# Altium PCB quark_dog_driver.PcbDoc (part 3 of 3)
Units mil, origin at the board's own origin, x right, y up, seen from the top; angles counter-clockwise.
Board outline 3937.01 x 2362.2 mil, 4 copper layers (Top Layer 1, signal1, signal2, Bottom Layer 1), stack 23.756 mil thick; 353 components, 275 nets, 1099 pads, 468 vias.
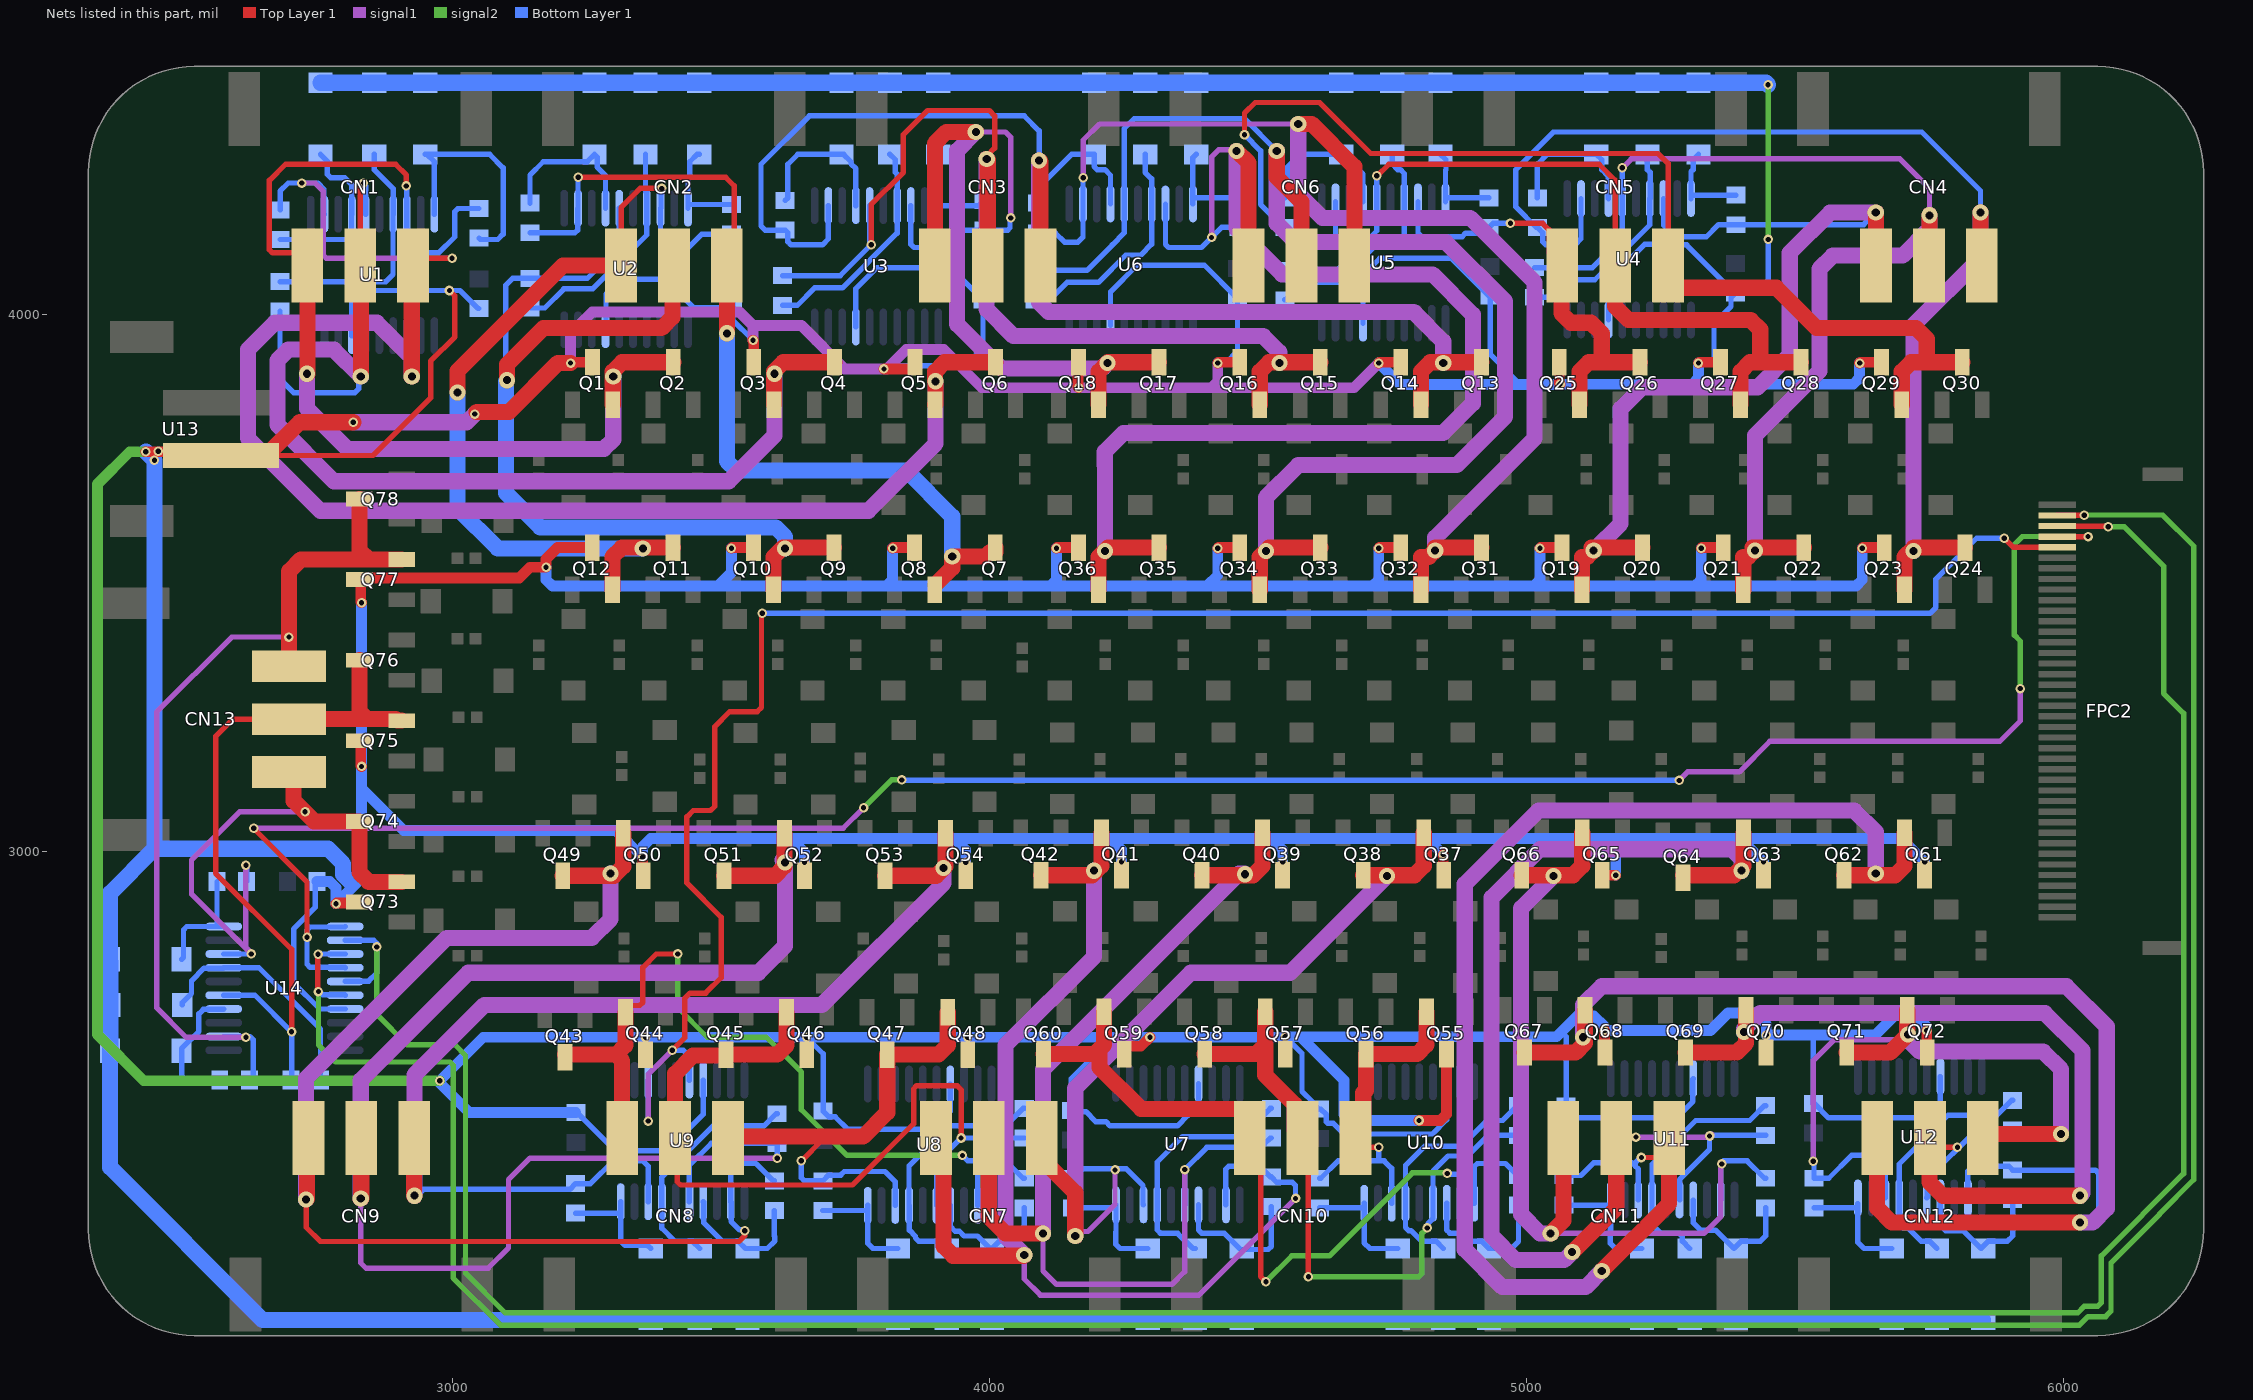
[diagram p5: the nets of this part, all layers, seen from the top]

## Via types
v1: diameter 17.72, hole 9.84, Top Layer 1 to Bottom Layer 1, tented both sides, 410 vias
v2: diameter 30, hole 15, Top Layer 1 to Bottom Layer 1, tented both sides, 54 vias
v3: diameter 78.74, hole 78.74, Top Layer 1 to Bottom Layer 1, 4 vias

## Nets (pads, with @x,y where several pads share a name; then routed paths per layer and width w, separated by ;. In a path a pad name is that pad's centre, name@x,y a point inside that pad or via, vN(x,y) a via of type N, cw(c..) or ccw(c..) an arc to the next point about the centre after c; other vN are vias at no path point) (continued)
PWM12_3: FPC2.36 U9.3 U9.6 | length 3815
  Top Layer 1 w10: v1(3410,2631) 3432.76,2653.76 3432.76,2726.76 3443,2737 3472,2737 3501,2766 3501,2878 3437,2942 3437,3065.12 3448.88,3077 3481,3077 3489,3085 3489,3233.14 3516.86,3261 3568,3261 3576,3269 3576,3442.58 v1(3577.52,3444.09) ; v1(5889,3584) 5905.89,3567.15 FPC2.36@5987.77,3567.15
  signal1 w10: v1(3365.02,2499.02) 3365.02,2586.02 v1(3410,2631)
  Bottom Layer 1 w10: v1(3365.02,2499.02) U9.3@3365.02,2575.03 ; v1(3410,2631) 3430.03,2631 3441.79,2619.24 U9.6@3441.79,2575.03 ; v1(3577.52,3444.09) 5751.09,3444.09 5762,3455 5762,3508 5838,3584 v1(5889,3584)
PWM13_1: FPC2.37 U14.1 U14.4 | length 4360.7
  Top Layer 1 w10: v1@2630,3044 2730,2944 v1(2730,2841) ; FPC2.37@5987.77,3586.83 5987.86,3586.92 6045.2,3586.92 v1(6045.28,3587)
  signal1 w10: v1(2631,3044) 3728,3044 v1(3766,3082) ; v1(5284,3133) 5300,3149 5396,3149 5453,3206 5881,3206 5919,3244 v1(5919,3304)
  signal2 w10: v1(3766,3082) 3818,3134 v1(3837,3134) ; v1(5919,3304) 5919,3392.33 5908,3403.33 5908,3572 5923,3587 v1(6045.28,3587)
  Bottom Layer 1 w10: U14.4@2801,2784.32 2800.17,2785.15 2735.86,2785.15 2730,2791.01 v1(2730,2841) 2730,2854.4 2735.86,2860.26 2800.17,2860.26 U14.1@2801,2861.09 ; v1(3837,3134) 3837.5,3133.5 5283.5,3133.5 v1(5284,3133)
PWM13_2: FPC2.38 U14.2 U14.5 | length 5671.6
  Top Layer 1 w10: FPC2.38@5987.77,3606.52 5988.43,3605.86 6082.14,3605.86 v1(6083,3605)
  signal2 w10: v1(2860,2823) 2860,2697 2916,2641 3005,2641 3025,2621 3025,2216 3099,2142 6026,2142 6038,2154 6063,2154 6070,2161 6070,2248 6223,2401 6223,3257.84 6186,3294.84 6186,3532 6113,3605 v1(6083,3605)
  Bottom Layer 1 w10: U14.5@2801,2758.73 2801.83,2759.56 2844.56,2759.56 2860,2775 v1(2860,2823) 2860,2829.64 2854.14,2835.5 U14.2@2801,2835.5
PWM13_3: FPC2.39 U14.3 U14.6 | length 5834.5
  Top Layer 1 w10: v1@2750,2740 2750,2808.88 v1(2750.56,2809.45) ; FPC2.39@5987.77,3626.2 5988.1,3626.53 6037.67,3626.53 v1(6038,3626.86)
  signal2 w10: v1(2751.26,2739.98) 2751.26,2640.74 2783,2609 2996.14,2609 3002,2603.14 3002,2207 3090,2119 6029,2119 6045,2135 6078,2135 6088,2145 6088,2235 6179,2326 6179,2327 6242,2390 6242,3569 6184,3627 6038.14,3627 v1(6038,3626.86)
  Bottom Layer 1 w10: v1@2750.09,2809.91 U14.3@2801,2809.91 ; v1(2751.26,2739.98) 2753.35,2739.98 2759.36,2733.97 2800.17,2733.97 U14.6@2801,2733.14
VB1_1: C2.1 D108.1 U1.20 | length 445.9
  Bottom Layer 1 w10: D108.1@2950,4298.37 D108.1@2953.36,4298.37 ; U1.20@2967.06,4187.06 2967.06,4284.66 D108.1@2953.36,4298.37 ; C2.1@3050,4142.44 3052.45,4140 3085,4140 3095,4150 3095,4273.42 3070.06,4298.37 D108.1@2953.36,4298.37
VB1_2: C4.2 D109.1 U1.17 | length 454
  Bottom Layer 1 w10: C4.2@2679.68,4061.59 2876.59,4061.59 2890,4075 2890,4186.77 U1.17@2890.29,4187.06 2890.29,4234.71 2855,4270 D109.1@2855,4298.37
VB1_3: C3.1 D110.1 U1.14 | length 328.2
  Bottom Layer 1 w10: C3.1@2680,4139.89 2807.66,4139.89 2812.69,4144.92 2812.69,4186.23 U1.14@2813.52,4187.06 2813.52,4241.48 2800,4255 2773.79,4255 2767.93,4260.86 2767.93,4285.44 D110.1@2755,4298.37
VB2_1: C7.1 D93.1 U2.20 | length 192.9
  Bottom Layer 1 w10: U2.20@3439.17,4198.06 U2.20@3439.17,4203 ; D93.1@3460,4298.37 3456.06,4298.37 3442.36,4284.66 3442.36,4257.36 3439.17,4254.17 U2.20@3439.17,4203 ; C7.1@3520,4205 3441.17,4205 U2.20@3439.17,4203
VB2_2: C5.2 D106.1 U2.17 | length 424.5
  Bottom Layer 1 w10: C5.2@3145,4012.45 3172.45,4012.45 3208,4048 3261.63,4048 3308.01,4094.38 3362.4,4148.77 3362.4,4226.36 3360,4228.76 D106.1@3360,4298.37
VB2_3: C6.1 D107.1 U2.14 | length 297.2
  Bottom Layer 1 w10: C6.1@3145,4207.56 3145,4260 3169.66,4284.66 3251.3,4284.66 D107.1@3265,4298.37 3270,4293.37 3270,4275 3285.62,4259.38 U2.14@3285.62,4198.06
VB3_1: C11.1 D84.1 U3.20 | length 183
  Bottom Layer 1 w10: D84.1@3905,4298.37 3905.17,4298.2 3905.17,4205.06 3907.17,4203.06 3980.51,4203.06 C11.1@3990,4212.56
VB3_2: C9.2 D91.1 U3.17 | length 421.2
  Bottom Layer 1 w10: C9.2@3615,4017.45 3642.45,4017.45 3675,4050 3726.67,4050 3828.4,4151.73 3828.4,4261.6 3825,4265 3825,4288.37 D91.1@3815,4298.37
VB3_3: C10.1 D92.1 U3.14 | length 285.8
  Bottom Layer 1 w10: C10.1@3620,4212.56 3625,4217.56 3625,4280 3643.37,4298.37 D92.1@3725,4298.37 3728.94,4298.37 3742.64,4284.66 3742.64,4280.73 3751.62,4271.74 U3.14@3751.62,4203.06
VB4_1: C23.1 D118.1 U6.20 | length 181.6
  Bottom Layer 1 w10: U6.20@4379.02,4206.06 U6.20@4379.02,4215.55 ; D118.1@4385,4298.37 4379.02,4292.39 U6.20@4379.02,4215.55 ; C23.1@4465,4217.56 4381.02,4217.56 U6.20@4379.02,4215.55
VB4_2: C21.2 D52.1 U6.17 | length 432.4
  Bottom Layer 1 w10: C21.2@4085,4027.45 4112.44,4027.45 4145,4060 4203,4060 4254,4111 4282,4111 4302.25,4131.25 U6.17@4302.25,4206.06 4302.25,4252.75 4290,4265 D52.1@4290,4298.37
VB4_3: C22.1 D53.1 U6.14 | length 271.9
  Bottom Layer 1 w10: C22.1@4090,4207.56 4090,4235 4153.37,4298.37 D53.1@4195,4298.37 4195,4275.86 4200.86,4270 4215,4270 4225.48,4259.52 U6.14@4225.48,4206.06
VB5_1: C18.1 D81.1 U5.20 | length 174.5
  Bottom Layer 1 w10: D81.1@4840,4298.37 4850,4288.37 4850,4270 4849.17,4269.17 U5.20@4849.17,4215.55 ; U5.20@4849.17,4210.06 U5.20@4849.17,4215.55 ; C18.1@4930,4217.56 4851.17,4217.56 U5.20@4849.17,4215.55
VB5_2: C20.2 D82.1 U5.17 | length 434.8
  Bottom Layer 1 w10: C20.2@4550,4027.45 4551.97,4027.45 4574.52,4050 4585,4050 4595,4060 4650,4060 4725,4135 4759.14,4135 4772.4,4148.25 U5.17@4772.4,4210.06 4772.4,4262.6 4765,4270 4760,4270 4750,4280 D82.1@4750,4298.37
VB5_3: C19.1 D83.1 U5.14 | length 276.6
  Bottom Layer 1 w10: C19.1@4550,4217.56 4555,4222.56 4555,4275 4578.37,4298.37 4658.94,4298.37 4695.62,4261.68 U5.14@4695.62,4210.06
VB6_1: C14.1 D72.1 U4.20 | length 172.7
  Bottom Layer 1 w10: U4.20@5306.17,4216.06 U4.20@5306.17,4220.55 ; D72.1@5320,4298.37 5310,4288.37 5310,4270 5306.17,4266.17 U4.20@5306.17,4220.55 ; C14.1@5390,4222.56 5308.17,4222.56 U4.20@5306.17,4220.55
VB6_2: C16.2 D79.1 U4.17 | length 403.6
  Bottom Layer 1 w10: C16.2@5015,4032.45 5042.44,4032.45 5075,4065 5127,4065 5229.4,4167.4 U4.17@5229.4,4216.06 5230,4216.66 5230,4265 5225,4270 D79.1@5225,4298.37
VB6_3: C15.1 D80.1 U4.14 | length 271.7
  Bottom Layer 1 w10: C15.1@5020,4217.56 5020,4280 5038.37,4298.37 D80.1@5130,4298.37 5140,4288.37 5140,4270 5151.8,4258.2 5151.8,4216.89 U4.14@5152.62,4216.06
VB7_1: C47.1 D54.1 U12.20 | length 222.4
  Bottom Layer 1 w10: C47.1@5535,2337.45 5614.83,2337.45 U12.20@5616.83,2339.45 ; U12.20@5616.83,2345 U12.20@5616.83,2339.45 ; D54.1@5680,2261.63 5628.37,2261.63 5616.83,2273.17 U12.20@5616.83,2339.45
VB7_2: C45.2 D55.1 U12.17 | length 461.8
  Bottom Layer 1 w10: D55.1@5764,2261.63 5750.3,2275.34 5734.66,2275.34 5710,2300 5700,2300 5693.6,2306.4 U12.17@5693.6,2355.94 5693.6,2418.6 5785,2510 5875.48,2510 5903.03,2537.55 C45.2@5905,2537.55
VB7_3: C46.1 D56.1 U12.14 | length 280.9
  Bottom Layer 1 w10: U12.14@5770.38,2355.94 5770.38,2304.62 5780,2295 5812.7,2295 5846.06,2261.63 5859.76,2275.34 5895.34,2275.34 5905,2285 C46.1@5905,2352.45
VB8_1: C42.1 D37.1 U11.20 | length 220.3
  Bottom Layer 1 w10: C42.1@5070,2342.45 5154.83,2342.45 5156.83,2340.44 5156.83,2297.84 5155.93,2296.94 5155.93,2271.14 5165.43,2261.63 D37.1@5215,2261.63
VB8_2: C44.2 D38.1 U11.17 | length 462.8
  Bottom Layer 1 w10: D38.1@5304,2261.63 5303.7,2261.63 5290,2275.34 5290,2284.14 5284.14,2290 5250,2290 5233.6,2306.4 U11.17@5233.6,2351.94 5233.6,2418.6 5315,2500 5415.48,2500 5443.03,2527.55 C44.2@5445,2527.55
VB8_3: C43.1 D39.1 U11.14 | length 258.9
  Bottom Layer 1 w10: U11.14@5310.38,2351.94 5310.38,2309.62 5324.04,2295.96 5351.73,2295.96 5386.06,2261.63 5399.76,2275.34 5435.34,2275.34 5445,2285 C43.1@5445,2337.45
VB9_1: C38.1 D25.1 U10.20 | length 224
  Bottom Layer 1 w10: C38.1@4615,2337.45 4695.83,2337.45 U10.20@4697.83,2339.45 ; U10.20@4697.83,2345.94 U10.20@4697.83,2339.45 ; D25.1@4760,2261.63 4708.37,2261.63 4697.83,2272.17 U10.20@4697.83,2339.45
VB9_2: C40.2 D26.1 U10.17 | length 458.6
  Bottom Layer 1 w10: D26.1@4845,2261.63 4831.3,2275.34 4804.66,2275.34 4785,2295 4780.46,2295 4774.6,2300.86 U10.17@4774.6,2345.94 4774.6,2416.43 4810.18,2452 4878,2452 4926,2500 4955.48,2500 4983.03,2527.55 C40.2@4985,2527.55
VB9_3: C39.1 D27.1 U10.14 | length 270.7
  Bottom Layer 1 w10: U10.14@4851.38,2345.94 4851.38,2296.19 4857.23,2290.34 4871.78,2290.34 4872.11,2290 4875,2290 4889.66,2275.34 4916.3,2275.34 D27.1@4930,2261.63 4971.63,2261.63 4985,2275 C39.1@4985,2342.45
VB10_1: C26.1 D57.1 U7.20 | length 218.4
  Bottom Layer 1 w10: C26.1@4155,2337.45 4233.83,2337.45 U7.20@4235.83,2339.45 ; U7.20@4235.83,2342.94 U7.20@4235.83,2339.45 ; D57.1@4295,2261.63 4243.37,2261.63 4235,2270 4235,2291.9 4235.83,2292.74 U7.20@4235.83,2339.45
VB10_2: C28.2 D70.1 U7.17 | length 464.9
  Bottom Layer 1 w10: D70.1@4383,2261.63 4379.06,2261.63 4350.69,2290 4325.17,2290 4324.83,2290.34 4318.46,2290.34 4312.6,2296.19 U7.17@4312.6,2342.94 4312.6,2422.6 4360,2470 4470.48,2470 4523.03,2522.55 C28.2@4525,2522.55
VB10_3: C27.1 D71.1 U7.14 | length 273.8
  Bottom Layer 1 w10: U7.14@4389.38,2342.94 4389.38,2296.19 4395.23,2290.34 4409.78,2290.34 4410.11,2290 4437.7,2290 4467.7,2260 4519.14,2260 4525,2265.86 C27.1@4525,2339.89
VB11_1: C31.1 D28.1 U8.20 | length 215.5
  Bottom Layer 1 w10: C31.1@3690,2332.45 3771.83,2332.45 U8.20@3773.83,2334.45 ; U8.20@3773.83,2341.94 U8.20@3773.83,2334.45 ; D28.1@3830,2261.63 3783.37,2261.63 3773.83,2271.17 U8.20@3773.83,2334.45
VB11_2: C29.2 D29.1 U8.17 | length 464.6
  Bottom Layer 1 w10: D29.1@3921,2261.63 3907.3,2275.34 3868.5,2275.34 3862.64,2281.19 3862.64,2284.48 3851.07,2296.05 3851.07,2341.47 U8.17@3850.6,2341.94 3850.6,2415.6 3925,2490 4030,2490 4035,2495 4035.48,2495 4063.03,2522.55 C29.2@4065,2522.55
VB11_3: C30.1 D30.1 U8.14 | length 253.1
  Bottom Layer 1 w10: U8.14@3927.38,2341.94 3927.38,2302.62 3936.19,2293.81 3944.3,2293.81 3953.11,2285 3977.7,2285 4001.06,2261.63 D30.1@4005,2261.63 4018.37,2275 4050,2275 4065,2290 C30.1@4065,2337.45
VB12_1: C35.1 D16.1 U9.20 | length 220.1
  Bottom Layer 1 w10: C35.1@3230,2327.45 3311.84,2327.45 U9.20@3313.84,2329.45 ; U9.20@3313.84,2348.97 U9.20@3313.84,2329.45 ; D16.1@3370,2261.63 3364.15,2267.49 3321.81,2267.49 3313.84,2275.46 U9.20@3313.84,2329.45
VB12_2: C33.2 D17.1 U9.17 | length 444.5
  Bottom Layer 1 w10: D17.1@3461,2261.63 3447.63,2275 3415,2275 3390.61,2299.39 3390.61,2394.61 3486,2490 3580.48,2490 3603.03,2512.55 C33.2@3605,2512.55
VB12_3: C34.1 D18.1 U9.14 | length 254.9
  Bottom Layer 1 w10: U9.14@3467.38,2348.97 3468.21,2348.14 3468.21,2309.91 3503.12,2275 3532.7,2275 3546.06,2261.63 3586.63,2261.63 3600.86,2275.86 3600.86,2284.14 3600,2285 C34.1@3600,2332.45
VB13_1: C50.1 D1.1 U14.20 | length 218.6
  Bottom Layer 1 w10: D1.1@2496.63,2800 2500,2803.37 2500,2855 2506.09,2861.09 U14.20@2564.45,2861.09 ; C50.1@2562.45,2945 2562.45,2863.09 U14.20@2564.45,2861.09 ; U14.20@2574.94,2861.09 U14.20@2564.45,2861.09
VB13_2: C52.2 D2.1 U14.17 | length 444.6
  Bottom Layer 1 w10: D2.1@2497.63,2715.03 2497.63,2718.97 2515,2736.33 2515,2760 2538.49,2783.49 2574.11,2783.49 U14.17@2574.94,2784.32 2640.68,2784.32 2755,2670 C52.2@2755,2575
VB13_3: C51.1 D3.1 U14.14 | length 252.8
  Bottom Layer 1 w10: C51.1@2567.45,2575 2505,2575 2496.63,2583.37 D3.1@2496.63,2630 2496.63,2633.94 2528.66,2665.96 2528.66,2698.66 2537.01,2707.01 2574.4,2707.01 U14.14@2574.94,2707.55
VIN: C1.2 C8.2 C12.2 C13.2 C17.2 C24.2 C25.2 C32.2 C36.2 C37.2 C41.2 C48.2 C49.2 D1.2 D2.2 D3.2 D16.2 D17.2 D18.2 D25.2 D26.2 D27.2 D28.2 D29.2 D30.2 D37.2 D38.2 D39.2 D52.2 D53.2 D54.2 D55.2 D56.2 D57.2 D70.2 D71.2 D72.2 D79.2 D80.2 D81.2 D82.2 D83.2 D84.2 D91.2 D92.2 D93.2 D106.2 D107.2 D108.2 D109.2 D110.2 D118.2 Q1.3 Q3.3 Q5.3 Q8.3 Q10.3 Q12.3 Q14.3 Q16.3 Q18.3 Q19.3 Q21.3 Q23.3 Q25.3 Q27.3 Q29.3 Q32.3 Q34.3 Q36.3 Q37.3 Q39.3 Q41.3 Q44.3 Q46.3 Q48.3 Q50.3 Q52.3 Q54.3 Q55.3 Q57.3 Q59.3 Q61.3 Q63.3 Q65.3 Q68.3 Q70.3 Q72.3 Q73.3 Q75.3 Q77.3 U1.7 U2.7 U3.7 U4.7 U5.7 U6.7 U7.7 U8.7 U9.7 U10.7 U11.7 U12.7 U13.2 U14.7 | length 32914.6
  Top Layer 1 w10: U13.2@2654.47,3737.82 2852.82,3737.82 2960,3845 2960,3913.41 3005,3958.41 3005,4035 v1(2995,4045)
  Top Layer 1 w20: v1(2430,3745) 2562.64,3745 U13.2@2569.82,3737.82 U13.2@2654.47,3737.82 ; v1(2784,2903.6) 2785.39,2905 Q73.3@2825,2905 ; Q75.3@2830,3200 2830,3160.39 v1(2831.4,3159) ; Q77.3@2830,3505 2830,3465.39 v1(2831.4,3464) ; Q77.3@2835,3510 3125,3510 3145,3530 v1(3175,3530) 3175,3545 3196.4,3566.4 Q12.3@3261,3566.4 ; v1(3042,3815) v1@3046,3819 ; v1(3220.58,3910) 3221.97,3911.4 Q1.3@3261.58,3911.4 ; v1(3355,2990) 3355,2965 3356,2964 Q50.3@3356,2955.63 ; v1(3520,3565) 3521.4,3566.4 Q10.3@3561,3566.4 ; v1(3560.18,3952.4) 3561.58,3951 Q3.3@3561.58,3911.4 ; v1(3803.86,3899) 3857.8,3899 3861.58,3902.78 Q5.3@3861.58,3911.4 ; v1(3820,3565) 3821.4,3566.4 Q8.3@3861,3566.4 ; v1(4125,3565) 4126.4,3566.4 Q36.3@4166,3566.4 ; Q18.3@4165,3905 4165,3865.39 v1(4166.4,3864) ; Q59.3@4251,2623.5 4251,2634.33 4254.78,2638.11 4282.11,2638.11 v1(4299,2655) ; v1(4425,3565) 4426.4,3566.4 Q34.3@4466,3566.4 ; v1(4425,3910) 4426.4,3911.4 Q16.3@4466,3911.4 ; v1(4725,3565) 4726.4,3566.4 Q32.3@4766,3566.4 ; v1(4725,3910) 4726.4,3911.4 Q14.3@4766,3911.4 ; v1(4800,2500) 4839.28,2500 4851,2511.72 Q55.3@4851,2623.5 ; Q37.3@4845,2970 v1(4845,2995) ; v1(5025,3565) 5026.4,3566.4 Q19.3@5066,3566.4 ; Q25.3@5061,3911.4 5061,3871.79 v1(5062.4,3870.39) ; Q65.3@5141,2956.6 v1(5166,2956.6) ; Q68.3@5145,2635 v1(5145,2667.39) ; v1(5320,3910) 5321.4,3911.4 Q27.3@5361,3911.4 ; v1(5325,3565) 5326.4,3566.4 Q21.3@5366,3566.4 ; v1(5620,3910) 5621.4,3911.4 Q29.3@5661,3911.4 ; v1(5625,3565) 5626.4,3566.4 Q23.3@5666,3566.4 ; Q72.3@5745,2635 v1(5745,2667.39)
  Top Layer 1 w30: U13.2@2654.47,3737.82 2716.48,3799.82 v1(2816,3799.82) ; v1@3046,3819 3106,3819 3197,3910 v1(3220.58,3910)
  signal1 w20: v1(3220.58,3910) 3220.58,3964.59 3260.98,4005 3535,4005 3560.18,3979.82 ; v1(3560.18,3952.4) 3560.18,3979.82 ; v1(4425,3910) 4425,3875.71 4413.28,3864 ; v1(4725,3910) 4679,3864 4413.28,3864 ; 3560.18,3979.82 3650.18,3979.82 3731,3899 v1(3803.86,3899) 3809.58,3899 3845.58,3935 3915,3935 3986,3864 v1(4166.4,3864) 4413.28,3864
  signal1 w30: v1(2816,3799.82) 3026.82,3799.82 v1(3042,3815)
  signal2 w10: v1(5450,4140) v1@5450,4430
  signal2 w20: v1(2430,3745) 2400,3745 2340,3685 2340,2660 2426,2574 v1(2977,2574)
  Bottom Layer 1 w10: C49.2@2748.55,2945.24 2745,2941.69 2745,2896.48 2705,2856.48 2705,2756.21 2753.66,2707.55 U14.7@2801,2707.55 ; U1.7@2813.52,3961 2813.52,4039.14 2819.38,4045 v1(2995,4045) 3014.62,4045 3048.14,4011.47 C1.2@3050.11,4011.47 ; C36.2@3230.79,2514.55 3232.76,2514.55 3303.31,2444 3400,2444 3467.38,2511.38 U9.7@3467.38,2575.03 ; U2.7@3285.62,3972 3286.45,3972.83 3286.45,4038.45 3314,4066 3396.57,4066 3449.57,4013 3512.74,4013 C8.2@3522.22,4022.47 3522.22,3990.37 v1(3560.18,3952.4) ; v1(3660,2655) 3690.78,2624.21 C32.2@3690.78,2517.53 3701.53,2506.78 3713.22,2506.78 3736,2484 3894,2484 3927.38,2517.38 U8.7@3927.38,2568 ; U3.7@3751.62,3977 3751.62,4048.62 3790,4087 3928.69,4087 C12.2@3988.22,4027.47 3988.22,3938.22 3955,3905 3811.95,3905 ; U6.7@4225.48,3980 4225.48,4042.48 4275,4092 4400.54,4092 C24.2@4462.07,4030.47 4462.07,3932.07 4441.48,3911.48 4426.48,3911.48 v1(4425,3910) ; 4270,2655 4230,2655 4152.78,2577.78 C25.2@4152.78,2518.53 4154.95,2516.36 4179.64,2516.36 4198,2498 4217,2498 4225,2490 4350,2490 4370,2510 4370.88,2510 4389.38,2528.5 U7.7@4389.38,2569 ; v1(4551,2655.9) 4582,2624.89 4582,2554.31 4602.07,2534.24 4602.07,2532.27 4612.82,2521.53 C37.2@4614.78,2521.53 4616.75,2521.53 4627.5,2510.78 4627.5,2497.5 4630,2495 4640,2495 4660,2475 4825,2475 4851.38,2501.38 U10.7@4851.38,2572 ; U5.7@4695.62,3984 4695.62,4073.62 4727,4105 4859.72,4105 4930.25,4034.47 C17.2@4932.22,4034.47 4932.22,3926.55 4932.13,3926.46 4988.19,3870.39 v1(5062.4,3870.39) ; 5065,2665 5073.78,2656.22 C41.2@5073.78,2527.53 5075.75,2527.53 5086.5,2516.78 5086.5,2514.81 5096.31,2505 5279.14,2505 5309.55,2535.4 5309.55,2577.17 U11.7@5310.38,2578 ; U4.7@5152.62,3990 5152.62,4063.62 5219.84,4130.84 5258.36,4130.84 5259.36,4129.84 5297.88,4129.84 5387.25,4040.47 C13.2@5389.22,4040.47 ; v1(5320,3910) 5343.14,3910 5349,3915.86 5349,3984 5380.58,4015.58 5380.58,4031.84 C13.2@5389.22,4040.47 ; v1(5450,4140) 5450,4045.86 5444.14,4040 5389.69,4040 C13.2@5389.22,4040.47 ; 5530,2659 5533.78,2655.21 C48.2@5533.78,2531.53 5535.75,2531.53 5562.28,2505 5750,2505 5770,2525 5770,2581.63 U12.7@5770.38,2582
  Bottom Layer 1 w20: C49.2@2748.55,2945.24 2748.8,2945 2772.28,2945 2784,2933.28 v1(2784,2903.6) 2831.4,2951 2831.4,3118.6 ; v1(2831.4,3464) v1(2831.4,3159) 2831.4,3118.6 ; v1(3175,3530) 3175,3506.72 3186.72,3495 3495,3495 ; C36.2@3230,2515 3031.72,2515 2977,2569.72 v1(2977,2574) 3058,2655 v1(3360,2655) v1(3660,2655) v1(3960,2655) 4230,2655 ; v1(3520,3565) 3520,3520 3495,3495 ; v1(3656,2980.63) 3656,2999 3630,3025 ; v1(3820,3565) 3820,3506.72 3808.28,3495 ; v1(3956,2980.63) 3956,3004 3935,3025 ; v1(4125,3565) 4125,3506.72 4113.28,3495 ; v1(4246,2981.6) 4246,3004 4225,3025 ; 4270,2655 v1(4299,2655) 4550.1,2655 v1(4551,2655.9) 4579.1,2655.9 ; v1(4425,3565) 4425,3515 4405,3495 ; v1(4546,2981.6) 4546,3004 4525,3025 ; v1(4725,3565) 4725,3506.72 4713.28,3495 ; v1(4725,3910) 4765,3870 v1@5062.01,3870 ; v1(4800,2500) 4671.72,2500 4660,2511.72 4660,2575 4579.1,2655.9 ; v1(4845,2995) 4815,3025 ; v1(5025,3565) 5025,3506.72 5013.28,3495 ; v1(5062.4,3870.39) 5308.28,3870.39 ; v1(5166,2956.6) 5166,3006.47 5147.47,3025 ; v1(5320,3910) 5320,3882.11 5308.28,3870.39 ; v1(5325,3565) 5325,3506.72 5313.28,3495 ; v1(5441,2981.6) 5397.6,3025 ; v1(5620,3910) 5620,3882.11 5608.28,3870.39 5308.28,3870.39 ; v1(5625,3565) 5625,3506.72 5613.28,3495 5313.28,3495 ; v1(5741,2981.6) 5697.6,3025 5397.6,3025 ; v1(5745,2667.39) 5745,2675 5725,2695 5685,2695 5649,2659 5530,2659 v1(5446,2659) 5446,2679 5425,2700 5375,2700 5342.4,2667.39 v1(5145,2667.39) 5145,2675 5125,2695 5095,2695 5065,2665 5055.9,2655.9 4579.1,2655.9 ; 2831.4,3118.6 2910,3040 3305,3040 v1(3355,2990) 3355,3010 3370,3025 3630,3025 ; 3495,3495 3808.28,3495 ; 3630,3025 3935,3025 ; 3808.28,3495 4113.28,3495 ; 3935,3025 4225,3025 ; 4113.28,3495 4405,3495 ; 4225,3025 4525,3025 ; 4405,3495 4713.28,3495 ; 4525,3025 4815,3025 ; 4713.28,3495 5013.28,3495 ; 4815,3025 5147.47,3025 ; 5013.28,3495 5313.28,3495 ; 5147.47,3025 5397.6,3025
  Bottom Layer 1 w30: D1.2@2363.37,2800 2363.37,2923.37 2445.92,3005.92 ; D1.2@2364.37,2795.03 D2.2@2364.37,2715.03 2364.37,2635.03 2363.37,2634.03 D3.2@2363.37,2630 2363.37,2412.63 2647.63,2128.37 D16.2@3370,2128.37 D17.2@3461,2128.37 D18.2@3550,2128.37 D28.2@3830,2128.37 D29.2@3921,2128.37 D30.2@4005,2128.37 D57.2@4295,2128.37 D70.2@4383,2128.37 D71.2@4470,2128.37 D25.2@4760,2128.37 D26.2@4845,2128.37 D27.2@4930,2128.37 D37.2@5215,2128.37 D38.2@5304,2128.37 D39.2@5390,2128.37 D54.2@5680,2128.37 D55.2@5764,2128.37 D56.2@5850,2128.37 ; v1(2430,3745) v1(2445.92,3729.08) 2445.92,3005.92 ; D110.2@2755,4431.63 D109.2@2855,4431.63 D108.2@2950,4431.63 D107.2@3265,4431.63 D106.2@3360,4431.63 D93.2@3460,4431.63 D92.2@3725,4431.63 D91.2@3815,4431.63 D84.2@3905,4431.63 D53.2@4195,4431.63 D52.2@4290,4431.63 D118.2@4385,4431.63 D83.2@4655,4431.63 D82.2@4750,4431.63 D81.2@4840,4431.63 D80.2@5130,4431.63 D79.2@5225,4431.63 D72.2@5320,4431.63 5445.91,4431.63 v1(5449.54,4428) ; 2810,2945 2797.22,2957.78 2797.22,2977.77 2769.07,3005.92 2445.92,3005.92
  other v1: 2453,3746
VS1_1: C2.2 CN1.3 Q1.2 Q2.3 U1.18 | length 1996.2
  Top Layer 1 w10: CN1.3@2730.58,4091.36 2706.94,4115 2665.86,4115 2660,4120.86 2660,4250 2690,4280 2895,4280 2915,4260 v1@2915,4240
  Top Layer 1 w30: v2@2730.58,3889.42 CN1.3@2730.58,4091.36 ; Q1.2@3298.98,3832.66 3298.98,3893.98 3316.4,3911.4 Q2.3@3411.58,3911.4
  signal1 w30: v2(2730,3890) 2730,3825 2805,3750 3282.43,3750 3300,3767.57 v2(3300,3885)
  Bottom Layer 1 w10: v1(2914.94,4239.53) 2915.41,4239.06 2915.41,4187.53 U1.18@2915.88,4187.06 2915.88,4124.98 2925.86,4115 2975,4115 3005,4145 3005,4191.7 3010.86,4197.56 C2.2@3050,4197.56
VS1_2: C4.1 CN1.2 Q3.2 Q4.3 U1.15 | length 2332.1
  Top Layer 1 w10: CN1.2@2829.01,4091.36 2829.01,4239.01 v1(2835,4245)
  Top Layer 1 w30: v2@2830.58,3889.42 CN1.2@2830.58,4091.36 ; Q3.2@3598.98,3832.66 3598.98,3893.98 3616.4,3911.4 Q4.3@3711.58,3911.4
  signal1 w30: v2(2830,3885) 2780,3935 2695,3935 2675,3915 2675,3795 2780,3690 3515,3690 3600,3775 v2(3600,3890)
  Bottom Layer 1 w10: C4.1@2679.68,4006.47 2679.68,3880.32 2705,3855 2819.14,3855 2826.17,3862.03 2826.17,3881.17 v2(2830,3885) ; v1(2835,4245) 2835,4242.91 2839.11,4238.8 U1.15@2839.11,4187.06
VS1_3: C3.2 CN1.1 Q5.2 Q6.3 U1.12 | length 3105.5
  Top Layer 1 w10: CN1.1@2927.43,4091.36 2941.07,4105 v1(3000,4105)
  Top Layer 1 w30: v2(2925,3885) 2925,4088.93 CN1.1@2927.43,4091.36 ; Q5.2@3898.98,3832.66 3900,3833.68 v2(3900,3876) ; v2@3898.98,3876 3898.98,3893.98 3916.4,3911.4 Q6.3@4011.58,3911.4
  signal1 w10: v1(2720,4245) 2745,4245 2760,4230 2760,4110.86 2765.86,4105 v1(3000,4105)
  signal1 w30: v2(2925,3885) 2925,3920 2860,3985 2670,3985 2620,3935 2620,3770 2755,3635 3775,3635 3900,3760 v2(3900,3876)
  Bottom Layer 1 w10: C3.2@2680,4195 2680,4230 2695,4245 v1(2720,4245) 2750,4245 2761.51,4233.49 2761.51,4187.89 U1.12@2762.34,4187.06
VS2_1: C7.2 CN2.3 Q11.3 Q12.2 U2.18 | length 1645
  Top Layer 1 w10: CN2.3@3314.58,4091.36 3314.58,4199.58 3350,4235 v1(3390,4235)
  Top Layer 1 w30: v2(3010,3855) 3010,3895 3206.36,4091.36 CN2.3@3314.58,4091.36 ; Q12.2@3298.41,3487.66 3298.41,3548.98 3315.82,3566.4 Q11.3@3411,3566.4
  Bottom Layer 1 w10: v1(3390,4235) 3388.82,4233.81 3388.82,4198.89 U2.18@3387.99,4198.06 3387.99,4132.87 3395.86,4125 3440,4125 3464.89,4149.89 C7.2@3520,4149.89
  Bottom Layer 1 w30: v2(3010,3855) 3010,3640 3085,3565 v2(3355,3565)
VS2_2: C5.1 CN2.2 Q9.3 Q10.2 U2.15 | length 1928
  Top Layer 1 w30: v2(3102,3878) 3102,3907 3170,3975 3390,3975 3410,3995 3410,4088.35 CN2.2@3413.01,4091.36 ; Q10.2@3598.41,3487.66 3598.41,3548.98 3615.82,3566.4 Q9.3@3711,3566.4
  Bottom Layer 1 w10: v2(3102,3878) 3100,3880 3100,4055 3112.55,4067.55 C5.1@3145,4067.55 3251.58,4067.55 3311.22,4127.19 U2.15@3311.22,4198.06
  Bottom Layer 1 w30: v2(3102,3878) 3100,3876 3100,3668.17 3164.17,3604 3602.43,3604 3620,3586.43 v2(3620,3565)
VS2_3: C6.2 CN2.1 Q7.3 Q8.2 U2.12 | length 1698.4
  Top Layer 1 w10: v1(3234.86,4255.61) 3509.39,4255.61 3525,4240 3525,4104.93 CN2.1@3511.43,4091.36
  Top Layer 1 w30: CN2.1@3511.43,4091.36 3511.43,3965.49 v2(3511.6,3965.32) ; Q8.2@3899.63,3497.27 3931,3528.64 v2(3931,3550) 3993.43,3550 4000.22,3556.79 4009.78,3556.79 4011,3558.01 Q7.3@4011,3566.4
  Bottom Layer 1 w10: C6.2@3145,4152.44 3228.59,4152.44 3233.61,4157.47 3233.61,4197.23 U2.12@3234.44,4198.06 3234.44,4255.19 v1(3234.86,4255.61) v1@3235.28,4256.03
  Bottom Layer 1 w30: v2(3511.6,3965.32) 3511.6,3727.57 3529.18,3710 3845,3710 3931,3624 v2(3931,3550)
VS3_1: C11.2 CN3.3 Q17.3 Q18.2 U3.18 | length 1696.8
  Top Layer 1 w30: CN3.3@3898.58,4091.36 3898.58,4318.58 3920.18,4340.18 v2(3974.82,4340.18) ; Q18.2@4203.4,3832.66 4203.4,3893.98 4220.82,3911.4 Q17.3@4316,3911.4
  signal1 w10: v2(3974.82,4340.18) 3975,4340 4030,4340 4040,4330 v1(4040,4180)
  signal1 w30: v2(3974.82,4340.18) 3940,4305.36 3940,3982.23 4022.47,3899.76 4209.76,3899.76 v2(4220,3910)
  Bottom Layer 1 w10: U3.18@3853.99,4203.06 3853.99,4131.01 3860,4125 3920,4125 3952.45,4157.44 C11.2@3990,4157.44 4034.14,4157.44 4038.52,4161.83 4038.52,4178.52 v1(4040,4180)
VS3_2: C9.1 CN3.2 Q15.3 Q16.2 U3.15 | length 2028.3
  Top Layer 1 w10: v1(3780,4130) 3780,4205 3840,4265 3840,4335 3885,4380 4000,4380 4010,4370 4010,4310.06 3995.18,4295.23 v2(3995.18,4289.82)
  Top Layer 1 w30: v2(3995.18,4289.82) 3997.01,4287.99 CN3.2@3997.01,4091.36 ; Q16.2@4503.4,3832.66 4503.4,3893.98 4520.82,3911.4 Q15.3@4616,3911.4
  signal1 w30: v2(3995.18,4289.82) 3995,4289.64 3995,4010 4045,3960 4510,3960 4540,3930 v2(4540,3910)
  Bottom Layer 1 w10: C9.1@3615,4072.55 3722.55,4072.55 3777.48,4127.48 3777.48,4129.74 3777.22,4130 U3.15@3777.22,4203.06
VS3_3: C10.2 CN3.1 Q13.3 Q14.2 U3.12 | length 2417.8
  Top Layer 1 w30: v2(4092.72,4287.28) 4095.43,4284.57 CN3.1@4095.43,4091.36 ; Q14.2@4803.4,3832.66 4803.4,3893.98 4820.82,3911.4 Q13.3@4916,3911.4
  signal1 w30: v2(4092.72,4287.28) 4092.72,4022.57 4110.29,4005 4790,4005 4845,3950 v2(4845,3910)
  Bottom Layer 1 w10: U3.12@3700.44,4203.06 3700.44,4141.3 3689.14,4130 3630.86,4130 3625,4135.86 3625,4152.44 C10.2@3620,4157.44 3582.55,4157.44 3575,4165 3575,4280 3665,4370 4065,4370 4092.72,4342.28 v2(4092.72,4287.28)
VS4_1: C23.2 CN6.3 Q35.3 Q36.2 U6.18 | length 2560.5
  Top Layer 1 w30: Q36.2@4203.4,3487.66 4203.4,3548.98 4220.82,3566.4 Q35.3@4316,3566.4 ; v2(4460,4305) 4482.58,4282.42 CN6.3@4482.58,4091.36
  signal1 w10: v1(4413.72,4143.72) 4413.72,4293.72 4426.86,4306.86 4458.14,4306.86 v2(4460,4305)
  signal1 w30: v2(4215,3560) 4215,3720 4214.93,3720.07 4214.93,3744.93 4250,3780 4845,3780 4900,3835 4900,4000 4825,4075 4545,4075 4460,4160 v2(4460,4305)
  Bottom Layer 1 w10: U6.18@4327.84,4206.06 4327.84,4130.86 4333.7,4125 4395,4125 v1(4413.72,4143.72) 4432.44,4162.44 C23.2@4465,4162.44
VS4_2: C21.1 CN6.2 Q33.3 Q34.2 U6.15 | length 2561.6
  Top Layer 1 w30: Q34.2@4503.4,3487.66 4503.4,3548.98 4520.82,3566.4 Q33.3@4616,3566.4 ; v2(4535,4305) 4535,4255.98 4581.01,4209.97 CN6.2@4581.01,4091.36
  signal1 w30: v2(4515,3560) 4515,3660 4575,3720 4870,3720 4960,3810 4960,4025 4850,4135 4570,4135 4535,4170 v2(4535,4305)
  Bottom Layer 1 w10: C21.1@4085,4082.55 4181.7,4082.55 4229,4129.86 4229,4130 4251.07,4152.07 U6.15@4251.07,4206.06 4251.07,4346.07 4270,4365 4475,4365 v2(4535,4305)
VS4_3: C22.2 CN6.1 Q31.3 Q32.2 U6.12 | length 2403.2
  Top Layer 1 w30: v2(4575,4355) 4600,4355 4679.43,4275.57 CN6.1@4679.43,4091.36 ; Q32.2@4803.4,3487.66 4803.4,3548.98 4817.98,3548.98 v2(4830,3561) ; v2@4830,3566.4 Q31.3@4916,3566.4
  signal1 w10: v1(4174.65,4254.65) 4174.65,4324.65 4205,4355 v2(4575,4355)
  signal1 w30: v2(4575,4355) 4575,4225 4620,4180 4895,4180 5015,4060 5015,3770 4830,3585 v2(4830,3561)
  Bottom Layer 1 w10: C22.2@4090,4152.44 4122.56,4152.44 4140,4135 4165,4135 4174.3,4144.3 U6.12@4174.3,4206.06 4174.47,4206.24 4174.47,4254.47 v1(4174.65,4254.65)
VS5_1: C18.2 CN5.3 Q25.2 Q26.3 U5.18 | length 812.8
  Top Layer 1 w10: v1(4970,4170) 5030,4170 5042.05,4157.95 5042.05,4115.89 5065,4092.94 CN5.3@5066.58,4091.36
  Top Layer 1 w30: CN5.3@5065,4092.94 5065,4002.57 5082.57,3985 5120,3985 5140,3965 5140,3911.4 ; Q25.2@5098.4,3832.66 5098.4,3893.98 5115.82,3911.4 5140,3911.4 ; Q26.3@5211,3911.4 5140,3911.4
  Bottom Layer 1 w10: U5.18@4797.99,4210.06 4797.99,4152.01 4805,4145 4880,4145 4886.7,4151.7 4919.25,4151.7 C18.2@4930,4162.44 4937.56,4170 v1(4970,4170)
VS5_2: C20.1 CN5.2 Q27.2 Q28.3 U5.15 | length 1535.8
  Top Layer 1 w10: v1(4721.22,4258.78) 4722.53,4258.78 4743.74,4280 5135,4280 5165.01,4249.99 CN5.2@5165.01,4091.36
  Top Layer 1 w30: CN5.2@5165.01,4091.36 5165,4015 5190,3990 5417.43,3990 5435,3972.43 5435,3911.4 ; Q27.2@5398.4,3832.66 5398.4,3893.98 5415.82,3911.4 5435,3911.4 ; Q28.3@5511,3911.4 5435,3911.4
  Bottom Layer 1 w10: C20.1@4550,4082.55 4647.56,4082.55 4721.22,4156.22 U5.15@4721.22,4210.06 v1(4721.22,4258.78) v1@4720,4260
VS5_3: C19.2 CN5.1 Q29.2 Q30.3 U5.12 | length 2242.2
  Top Layer 1 w10: v1(4475,4335) 4475,4375 4495,4395 4615,4395 4710,4300 5245,4300 5263.43,4281.57 CN5.1@5263.43,4091.36
  Top Layer 1 w30: CN5.1@5263.43,4091.36 5263.43,4064.53 5277.96,4050 5465,4050 5540,3975 5725,3975 5745,3955 5745,3911.4 ; Q29.2@5698.4,3832.66 5698.4,3893.98 5715.82,3911.4 5745,3911.4 ; Q30.3@5811,3911.4 5745,3911.4
  Bottom Layer 1 w10: v1(4475,4335) 4505,4305 4505,4205.48 4548.03,4162.44 C19.2@4550,4162.44 4555,4157.44 4555,4140.86 4560.86,4135 4635,4135 4644.44,4144.44 U5.12@4644.44,4210.06
VS6_1: C14.2 CN4.3 Q19.2 Q20.3 U4.18 | length 1776.1
  Top Layer 1 w30: Q19.2@5103.4,3487.66 5103.4,3548.98 5112.98,3548.98 v2(5125,3561) ; v2@5120.82,3566.4 Q20.3@5216,3566.4 ; v2(5650,4190) 5650.58,4189.42 CN4.3@5650.58,4091.36
  signal1 w30: v2(5125,3561) 5175,3611 5175,3825 5215,3865 5430,3865 5490,3925 5490,4115 5565,4190 v2(5650,4190)
  Bottom Layer 1 w10: U4.18@5254.99,4216.06 5254.99,4166.77 5276.76,4145 5335,4145 5357.44,4167.44 C14.2@5390,4167.44 5627.44,4167.44 v2(5650,4190)
VS6_2: C16.1 CN4.2 Q21.2 Q22.3 U4.15 | length 2082.2
  Top Layer 1 w30: Q21.2@5403.4,3487.66 5403.4,3548.98 5412.98,3548.98 v2(5425,3561) ; v2@5420.82,3566.4 Q22.3@5516,3566.4 ; CN4.2@5749.01,4091.36 5750,4092.35 v2(5750,4185)
  signal1 w10: v1(5178.22,4273.22) 5178.39,4273.22 5195.17,4290 5695,4290 5750,4235 v2(5750,4185)
  signal1 w30: v2(5425,3561) 5425,3775 5545,3895 5545,4085 5570,4110 5700,4110 5750,4160 v2(5750,4185)
  Bottom Layer 1 w10: C16.1@5015,4087.55 5122.56,4087.55 5178.22,4143.22 U4.15@5178.22,4216.06 v1(5178.22,4273.22) v1@5180,4275
VS6_3: C15.2 CN4.1 Q23.2 Q24.3 U4.12 | length 2251.8
  Top Layer 1 w30: Q23.2@5703.4,3487.66 5703.4,3548.98 5720.82,3566.4 Q24.3@5816,3566.4 ; v2(5845,4190) 5845,4093.79 CN4.1@5847.43,4091.36
  signal1 w30: v2(5720,3560) 5720,3980 5845,4105 v2(5845,4190)
  Bottom Layer 1 w10: U4.12@5101.44,4216.06 5101.44,4141.44 5090,4130 5035.86,4130 5030,4135.86 5030,4152.44 C15.2@5020,4162.44 5018.03,4162.44 4980,4200.48 4980,4270 5050,4340 5735.7,4340 5845,4230.7 v2(5845,4190)
VS7_1: C47.2 CN12.3 Q71.3 Q72.2 U12.18 | length 1393.5
  Top Layer 1 w30: Q71.3@5596,2626.6 5676.6,2626.6 v2(5710,2660) ; v2@5708.6,2660 Q72.2@5708.6,2705.34 ; CN12.3@5849.43,2467.7 5856.73,2475 v2(5995,2475)
  signal1 w10: v1(5533.61,2424.11) 5533.61,2611.01 5572.6,2650 v2@5710,2650
  signal1 w30: v2(5710,2660) 5710,2650 5731.88,2628.12 5961.88,2628.12 5995,2595 v2(5995,2475)
  Bottom Layer 1 w10: v1@5535,2425 C47.2@5535,2392.55 5562.56,2392.55 5605,2435 5655,2435 5668.01,2421.99 U12.18@5668.01,2355.94
VS7_2: C45.1 CN12.2 Q69.3 Q70.2 U12.15 | length 1807.8
  Top Layer 1 w10: CN12.2@5757,2445 5762,2450 v1(5802,2450)
  Top Layer 1 w30: Q69.3@5296,2626.6 5391.18,2626.6 5408.6,2644.02 Q70.2@5408.6,2705.34 ; CN12.2@5757,2445 5751,2451 CN12.2@5751,2467.7 5750,2466.7 5750,2385 5775,2360 v2(6030,2360)
  signal1 w30: v2(5405,2665) 5405,2670 5435,2700 5965,2700 6035,2630 6035,2365 v2(6030,2360)
  Bottom Layer 1 w10: U12.15@5744.78,2355.94 5745.61,2356.77 5745.61,2390.61 5837.44,2482.45 C45.1@5905,2482.45
VS7_3: C46.2 CN12.1 Q67.3 Q68.2 U12.12 | length 2606.1
  Top Layer 1 w30: Q67.3@4996,2626.6 5091.18,2626.6 5108.6,2644.02 Q68.2@5108.6,2705.34 ; CN12.1@5652.57,2467.7 5652.57,2337.43 5680,2310 v2(6030,2310)
  signal1 w30: v2(5105,2655) 5105,2715 5140,2750 6005,2750 6080,2675 6080,2336.52 6053.48,2310 v2(6030,2310)
  Bottom Layer 1 w10: U12.12@5821.56,2355.94 5821.56,2405.7 5830.86,2415 5897.56,2415 C46.2@5905,2407.55 6059.14,2407.55 6065,2401.7 6065,2315.86 6059.14,2310 v2(6030,2310)
VS8_1: C42.2 CN11.3 Q61.2 Q62.3 U11.18 | length 2663.7
  Top Layer 1 w10: v1(5213.86,2431.14) 5240.9,2431.14 5240.9,2432.59 5265.43,2457.12 CN11.3@5265.43,2467.7
  Top Layer 1 w30: v2(5140,2220) 5265.43,2345.43 CN11.3@5265.43,2457.12 ; Q62.3@5591,2956.6 5686.18,2956.6 5703.6,2974.02 Q61.2@5703.6,3035.34
  signal1 w30: v2(5140,2220) 5110,2190 4955,2190 4885,2260 4885,2940 5022,3077 5610.38,3077 5650,3037.38 v2(5650,2960)
  Bottom Layer 1 w10: C42.2@5070,2397.55 5101.06,2397.55 5124.69,2421.18 5196.18,2421.18 5199.32,2418.05 ; U11.18@5208.01,2351.94 5208.01,2409.35 5202.1,2415.27 5202.1,2420.83 5212.41,2431.14 v1(5213.86,2431.14)
VS8_2: C44.1 CN11.2 Q63.2 Q64.3 U11.15 | length 2197.3
  Top Layer 1 w10: CN11.2@5167,2467.7 5169.3,2470 v1@5205,2470
  Top Layer 1 w30: v2(5085,2255) 5167,2337 CN11.2@5167,2467.7 ; Q64.3@5291,2956.6 5386.18,2956.6 5403.6,2974.02 Q63.2@5403.6,3035.34
  signal1 w10: v1(5203.61,2469.11) 5339.11,2469.11 v1@5345,2475
  signal1 w30: v2(5085,2255) 5070,2240 4980,2240 4935,2285 4935,2915 5025,3005 5382.43,3005 5400,2987.43 v2(5400,2965)
  Bottom Layer 1 w10: U11.15@5284.78,2351.94 5285.1,2352.25 5285.1,2390.1 5340.66,2445.66 v1(5340.66,2471.16) ; v1@5337.44,2472.45 C44.1@5445,2472.45
VS8_3: C43.2 CN11.1 Q65.2 Q66.3 U11.12 | length 1689
  Top Layer 1 w30: Q66.3@4991,2956.6 5086.18,2956.6 5103.6,2974.02 Q65.2@5103.6,3035.34 ; v2(5045,2290) 5068.57,2313.57 CN11.1@5068.57,2467.7
  signal1 w10: v2(5045,2290) 5330.07,2290 5361.61,2321.55 5361.61,2416.61 v1@5365,2420
  signal1 w30: v2(5045,2290) 5025,2290 4990,2325 4990,2895 v2(5050,2955)
  Bottom Layer 1 w10: U11.12@5361.56,2351.94 5361.56,2419.14 5367.41,2425 5410.59,2425 5443.03,2392.55 C43.2@5445,2392.55
  other v1: 5363.61,2419.11
VS9_1: C38.2 CN10.3 Q55.2 Q56.3 U10.18 | length 639.2
  Top Layer 1 w10: CN10.3@4681.43,2467.7 4699.13,2450 v1(4725,2450)
  Top Layer 1 w30: CN10.3@4681.43,2467.7 4695.96,2482.23 4695.96,2550.96 4701,2556 Q56.3@4701,2623.5 4796.18,2623.5 4813.6,2640.92 Q55.2@4813.6,2702.24
  Bottom Layer 1 w10: C38.2@4615,2392.55 4616.97,2392.55 4649.41,2425 4725,2425 ; v1(4725,2450) 4725,2425 ; U10.18@4749.01,2345.94 4749.01,2410.99 4735,2425 4725,2425
VS9_2: C40.1 CN10.2 Q57.2 Q58.3 U10.15 | length 1246.1
  Top Layer 1 w10: CN10.2@4583,2467.7 4594,2456.7 v1(4594,2209)
  Top Layer 1 w30: Q58.3@4401,2623.5 4496.18,2623.5 4513.6,2640.92 ; Q57.2@4513.6,2702.24 4513.6,2640.92 ; CN10.2@4583,2467.7 4568.47,2482.23 4568.47,2529.53 4513.6,2584.41 4513.6,2640.92
  signal2 w10: v1(4594,2209) 4799.14,2209 4805,2214.86 4805,2290 v1(4815,2300)
  Bottom Layer 1 w10: v1(4815,2300) 4816.48,2301.48 4816.48,2308.33 4825.78,2317.64 U10.15@4825.78,2345.94 4825.78,2405.78 4854,2434 4890,2434 4928.44,2472.45 C40.1@4985,2472.45
VS9_3: C39.2 CN10.1 Q59.2 Q60.3 U10.12 | length 1486.6
  Top Layer 1 w10: CN10.1@4484.58,2467.7 4505,2447.28 4505,2210 v1(4515,2200)
  Top Layer 1 w30: Q60.3@4101,2623.5 4196.18,2623.5 4205,2632.32 ; Q59.2@4213.6,2702.24 4213.6,2640.92 4205,2632.32 ; CN10.1@4484.58,2467.7 4484.58,2507.07 4470.05,2521.6 4282.4,2521.6 4205,2599 4205,2632.32
  signal2 w10: v1(4515,2200) 4563,2248 4633,2248 4787.47,2402.47 4851.29,2402.47 v1(4852.33,2401.42)
  Bottom Layer 1 w10: v1(4852.33,2401.42) 4853.76,2400 4902.56,2400 ; U10.12@4902.56,2345.94 4902.56,2400 ; C39.2@4985,2397.55 4983.03,2397.55 4960.59,2420 4908.41,2420 4902.56,2414.14 4902.56,2400
VS10_1: C26.2 CN7.3 Q37.2 Q38.3 U7.18 | length 1758.8
  Top Layer 1 w30: CN7.3@4097.43,2467.7 4097.43,2428.33 4160,2365.76 v2(4160,2285) ; Q38.3@4696,2956.6 4791.18,2956.6 4808.6,2974.02 Q37.2@4808.6,3035.34
  signal1 w10: v2(4160,2285) 4165.41,2285 4173.9,2293.49 4183.49,2293.49 4189,2299 4234,2344 v1(4234,2408)
  signal1 w30: v2(4160,2285) 4160,2293.49 4160,2560 4375,2775 4560,2775 v2(4740,2955)
  Bottom Layer 1 w10: C26.2@4155,2392.55 4156.97,2392.55 4167.72,2403.3 4167.72,2404.14 4173.57,2410 4255,2410 4286.19,2378.82 4286.19,2343.77 U7.18@4287.01,2342.94
VS10_2: C28.1 CN7.2 Q39.2 Q40.3 U7.15 | length 2068.7
  Top Layer 1 w30: CN7.2@3999,2467.7 3999,2321 4030,2290 v2(4100,2290) ; Q40.3@4396,2956.6 4491.18,2956.6 4508.6,2974.02 Q39.2@4508.6,3035.34
  signal1 w10: v2(4100,2290) 4100,2220 4125,2195 4340,2195 4363.78,2218.78 v1(4363.78,2408.78)
  signal1 w30: v2(4100,2290) 4100,2595 4465,2960 v2@4475,2960
  Bottom Layer 1 w10: U7.15@4363.78,2342.94 v1(4363.78,2408.78) 4405,2450 4506.43,2450 4512.28,2455.86 4512.28,2456.7 4523.03,2467.45 C28.1@4525,2467.45
  other v2: 4476.21,2958.39
VS10_3: C27.2 CN7.1 Q41.2 Q42.3 U7.12 | length 2219.6
  Top Layer 1 w30: CN7.1@3900.57,2467.7 3915,2453.27 3915,2265.91 3932.57,2248.33 4063.33,2248.33 v2(4065,2250) ; Q42.3@4096,2956.6 4191.18,2956.6 4208.6,2974.02 Q41.2@4208.6,3035.34
  signal1 w10: v2(4065,2250) 4065,2205 4095,2175 4390,2175 v1(4570,2355)
  signal1 w30: v2(4065,2250) 4030,2285 4030,2640 4195,2805 v2(4195,2965)
  Bottom Layer 1 w10: U7.12@4440.56,2342.94 4440,2343.5 4440,2409.14 4445.86,2415 4503.03,2415 4523.03,2395 C27.2@4525,2395 4535,2385 4564.14,2385 4570,2379.14 v1(4570,2355)
VS11_1: C31.2 CN8.3 Q47.3 Q48.2 U8.18 | length 934.5
  Top Layer 1 w10: v1(3650,2425) 3690,2465 3690,2470
  Top Layer 1 w30: CN8.3@3513.43,2467.7 3515.73,2470 3690,2470 3765,2470 3810,2515 Q47.3@3810,2622.6 3905.18,2622.6 3922.59,2640.02 Q48.2@3922.59,2701.34
  Bottom Layer 1 w10: v1(3650,2425) 3650,2393.41 3655.86,2387.55 C31.2@3690,2387.55 3700.75,2398.3 3723.3,2398.3 3730,2405 3805.74,2405 3825.01,2385.72 U8.18@3825.01,2341.94
VS11_2: C29.1 CN8.2 Q45.3 Q46.2 U8.15 | length 1494.8
  Top Layer 1 w10: CN8.2@3415,2467.7 3419.14,2463.55 3419.14,2385.86 3425,2380 3745,2380 3859,2494 3859,2559.14 3864.86,2565 3940,2565 3947.45,2557.55 v1(3947.45,2467.45)
  Top Layer 1 w30: CN8.2@3415,2467.7 3415,2587.43 3448.78,2621.21 3508.78,2621.21 3510,2622.43 Q45.3@3510,2622.6 3605.18,2622.6 3622.59,2640.02 Q46.2@3622.59,2701.34
  Bottom Layer 1 w10: U8.15@3901.78,2341.94 3901.78,2421.78 v1(3947.45,2467.45) C29.1@4065,2467.45
VS11_3: C30.2 CN8.1 Q43.3 Q44.2 U8.12 | length 1528.9
  Top Layer 1 w10: Q44.2@3322.59,2701.34 3322.59,2705.36 3331.37,2714.14 3349.14,2714.14 3355,2720 3355,2785 3380,2810 v1(3420,2810)
  Top Layer 1 w30: Q43.3@3210,2622.6 3305.18,2622.6 ; CN8.1@3316.57,2467.7 3316.57,2611.21 3305.18,2622.6 ; Q44.2@3322.59,2701.34 3322.59,2640.02 3305.18,2622.6
  signal2 w10: v1(3420,2810) 3420,2710 3475,2655 3585,2655 3650,2590 3650,2520 3735,2435 v1(3950,2435)
  Bottom Layer 1 w10: v1(3950,2435) 3960,2425 3990,2425 ; U8.12@3978.56,2341.94 3978.56,2413.56 3990,2425 ; C30.2@4065,2392.55 4063.03,2392.55 4030.59,2425 3990,2425
VS12_1: C35.2 CN9.3 Q53.3 Q54.2 U9.18 | length 2207
  Top Layer 1 w30: CN9.3@2929.43,2467.7 2929.43,2360.57 v2(2930,2360) ; Q53.3@3806,2955.63 3901.18,2955.63 3918.6,2973.05 Q54.2@3918.6,3034.37
  signal1 w30: v2(2930,2360) 2930,2585 3060,2715 3688,2715 3915,2942 v2(3915,2970)
  Bottom Layer 1 w10: v2(2930,2360) 2935.41,2360 2947.22,2371.81 3219.25,2371.81 C35.2@3230,2382.55 3257.55,2382.55 3300,2425 3355,2425 3365,2415 U9.18@3365.02,2348.97
VS12_2: C33.1 CN9.2 Q51.3 Q52.2 U9.15 | length 2903.8
  Top Layer 1 w30: v2(2830,2355) 2831,2356 CN9.2@2831,2467.7 ; Q51.3@3506,2955.63 3601.18,2955.63 3618.6,2973.05 Q52.2@3618.6,3034.37
  signal1 w10: v2(2830,2355) 2830,2235 2840,2225 3067.22,2225 3105,2262.78 3105,2390 3145,2430 v1(3605,2430)
  signal1 w30: v2(2830,2355) 2830,2575 3030,2775 3570,2775 3620,2825 v2(3620,2980) v2@3615,2985
  Bottom Layer 1 w10: U9.15@3441.79,2348.97 3441.79,2416.79 3482.45,2457.45 C33.1@3605,2457.45 v1(3605,2430)
VS12_3: C34.2 CN9.1 Q49.3 Q50.2 U9.12 | length 2420.4
  Top Layer 1 w10: v2(2728.3,2353.24) 2728.3,2301.27 2754.8,2274.77 3534.05,2274.77 3545,2285.73 v1(3545,2295)
  Top Layer 1 w30: v2@2730,2355 2730,2465.13 CN9.1@2732.57,2467.7 ; Q49.3@3206,2955.63 3301.18,2955.63 3318.6,2973.05 Q50.2@3318.6,3034.37
  signal1 w30: v2(2728.3,2353.24) 2728.3,2578.3 2990,2840 3260,2840 3295,2875 v2(3295,2960)
  Bottom Layer 1 w10: v1(3545,2295) 3543.52,2296.48 3534.98,2296.48 3519.39,2312.07 3519.39,2348.14 U9.12@3518.56,2348.97 3518.56,2414.14 3524.42,2420 3565.59,2420 3598.03,2387.55 C34.2@3600,2387.55
VS13_1: C50.2 CN13.3 Q73.2 Q74.3 U14.18 | length 1095.2
  Top Layer 1 w30: CN13.3@2696.67,3148.61 2705,3140.28 2705,3095 2743.16,3056.84 Q74.3@2827.52,3056.84 2827.52,2961.66 2844.93,2944.25 Q73.2@2906.25,2944.25
  signal1 w10: v1(2616.26,2974.98) 2616.26,2822.07 2626.26,2812.07 v1(2626.26,2809.98) 2515,2921.24 2515,2985 2605,3075 v1@2725,3075
  Bottom Layer 1 w10: U14.18@2574.94,2809.91 2624.91,2809.91 v1@2625,2810 ; v1@2615,2975 2617.55,2972.45 C50.2@2617.55,2945
  other v1: 2726.26,3074.98
VS13_2: C52.1 CN13.2 Q75.2 Q76.3 U14.15 | length 1330.2
  Top Layer 1 w10: CN13.2@2696.67,3247.03 2592.03,3247.03 2560,3215 2560,2960 2701.26,2818.74 v1(2701.26,2664.98)
  Top Layer 1 w30: CN13.2@2696.67,3247.03 2842.15,3247.03 ; Q76.3@2827.52,3356.84 2827.52,3261.66 2842.15,3247.03 ; Q75.2@2906.25,3244.25 2897.87,3244.25 2895.08,3247.03 2842.15,3247.03
  Bottom Layer 1 w10: U14.15@2574.94,2733.14 2633.1,2733.14 v1(2701.26,2664.98) 2701.26,2576.37 C52.1@2699.89,2575
VS13_3: C51.2 CN13.1 Q77.2 Q78.3 U14.12 | length 1693.2
  Top Layer 1 w30: CN13.1@2696.67,3345.46 2696.67,3522.43 2718.49,3544.25 2844.93,3544.25 ; Q78.3@2827.52,3656.84 2827.52,3561.66 2844.93,3544.25 ; Q77.2@2906.25,3544.25 2844.93,3544.25
  signal1 w10: v1(2616.26,2654.98) 2505.02,2654.98 2450,2710 2450,3260 2590,3400 v1@2695,3400
  Bottom Layer 1 w10: U14.12@2574.94,2656.37 2623.63,2656.37 2630,2650 2630,2582.45 C51.2@2622.55,2575
  other v1: 2696.26,3399.98
pads on no net: CN1.4 CN1.5 CN2.4 CN2.5 CN3.4 CN3.5 CN4.4 CN4.5 CN5.4 CN5.5 CN6.4 CN6.5 CN7.4 CN7.5 CN8.4 CN8.5 CN9.4 CN9.5 CN10.4 CN10.5 CN11.4 CN11.5 CN12.4 CN12.5 CN13.4 CN13.5 FPC2.40 FPC2.41 FPC2.42 U13.3 U13.4
copper on no net:
  other v3: 2442.25,2217.94 6143.03,2217.94 2442.25,4343.92 6143.03,4343.92

## Polygon pours and split planes (outlines as drawn)
PGND on Top Layer 1 "PGND_L01_P000" (solid, pour order 0): 2323.15,2296.65 ccw(c2520,2296.65) 2520,2099.8 6063.31,2099.8 ccw(c6063.31,2296.65) 6260.16,2296.65 6260.16,4265.15 ccw(c6063.31,4265.15) 6063.31,4462 2520,4462 ccw(c2520,4265.15) 2323.15,4265.15
PGND on Bottom Layer 1 "PGND_L04_P001" (solid, pour order 1): 2323.15,2296.65 ccw(c2520,2296.65) 2520,2099.8 6063.31,2099.8 ccw(c6063.31,2296.65) 6260.16,2296.65 6260.16,4265.15 ccw(c6063.31,4265.15) 6063.31,4462 2520,4462 ccw(c2520,4265.15) 2323.15,4265.15

## Silkscreen, mask and mechanical layers (free items; w line width, h text height)
Bottom Overlay:
  text "QUARK-FOC" at 6041,3078 h400
Mechanical 1:
  lines w7.99: 2323.15,2296.65 ccw(c2520,2296.65) 2520,2099.8 ; 2323.15,4265.15 cw(c2520,4265.15) 2520,4462 ; 6063.31,2099.8 ccw(c6063.31,2296.65) 6260.16,2296.65 ; 6063.31,4462 cw(c6063.31,4265.15) 6260.16,4265.15
  lines w8: 2323,2296 2323,4267 ; 2520,2100 6060,2100 ; 2521,4462 6064,4462 ; 6260,2297 6260,4264